# Altium PCB CFD_Chip_Test_noRouting.PcbDoc
Units mil, origin at the board's own origin, x right, y up, seen from the top; angles counter-clockwise.
Board outline 3165 x 2795 mil, 2 copper layers (Top Layer, Bottom Layer); 72 components, 49 nets, 279 pads, 30 vias.
Unrouted connection lines stored in the file: 183.
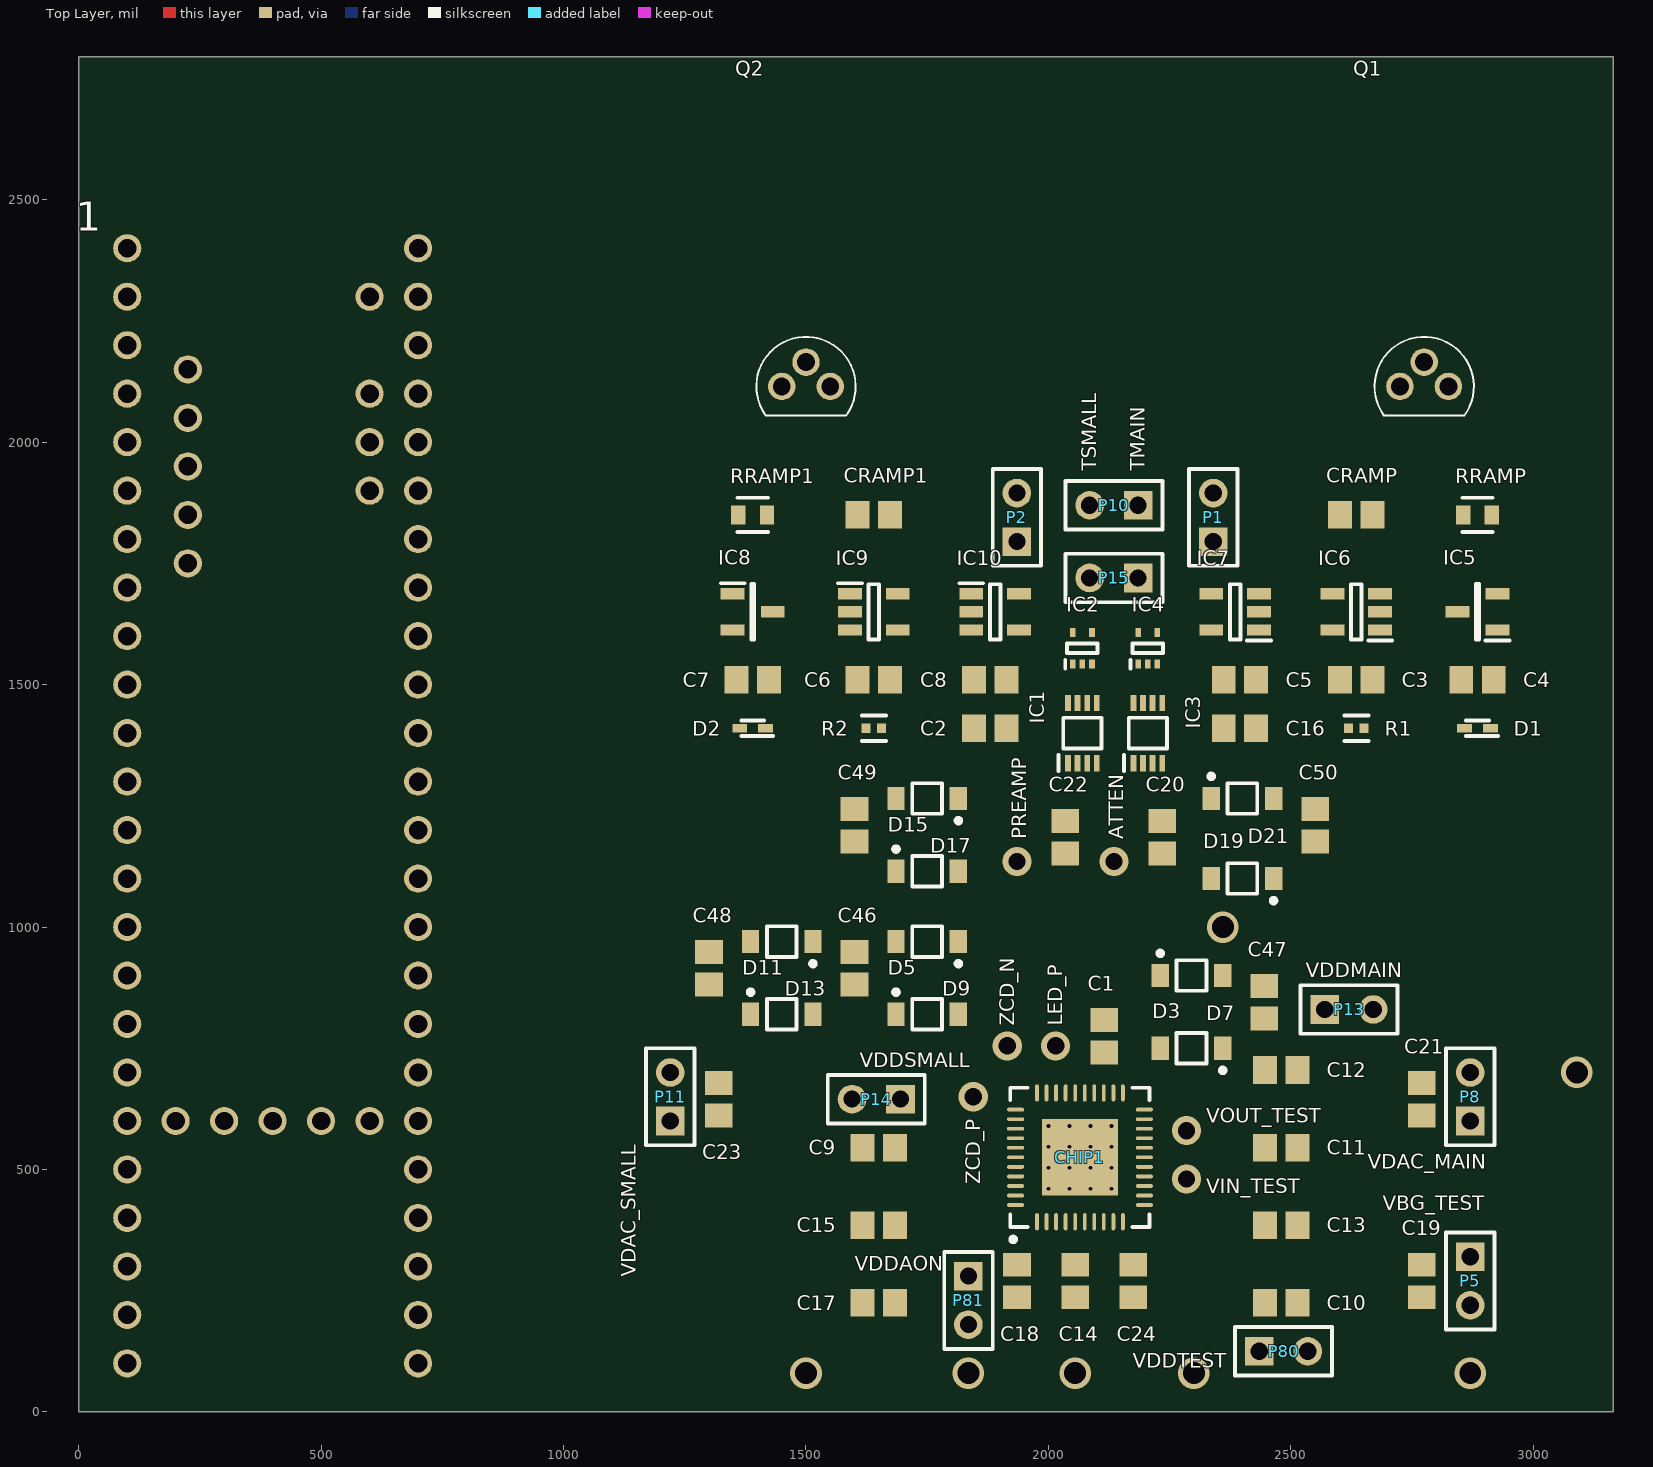
[diagram p0: Top Layer view]
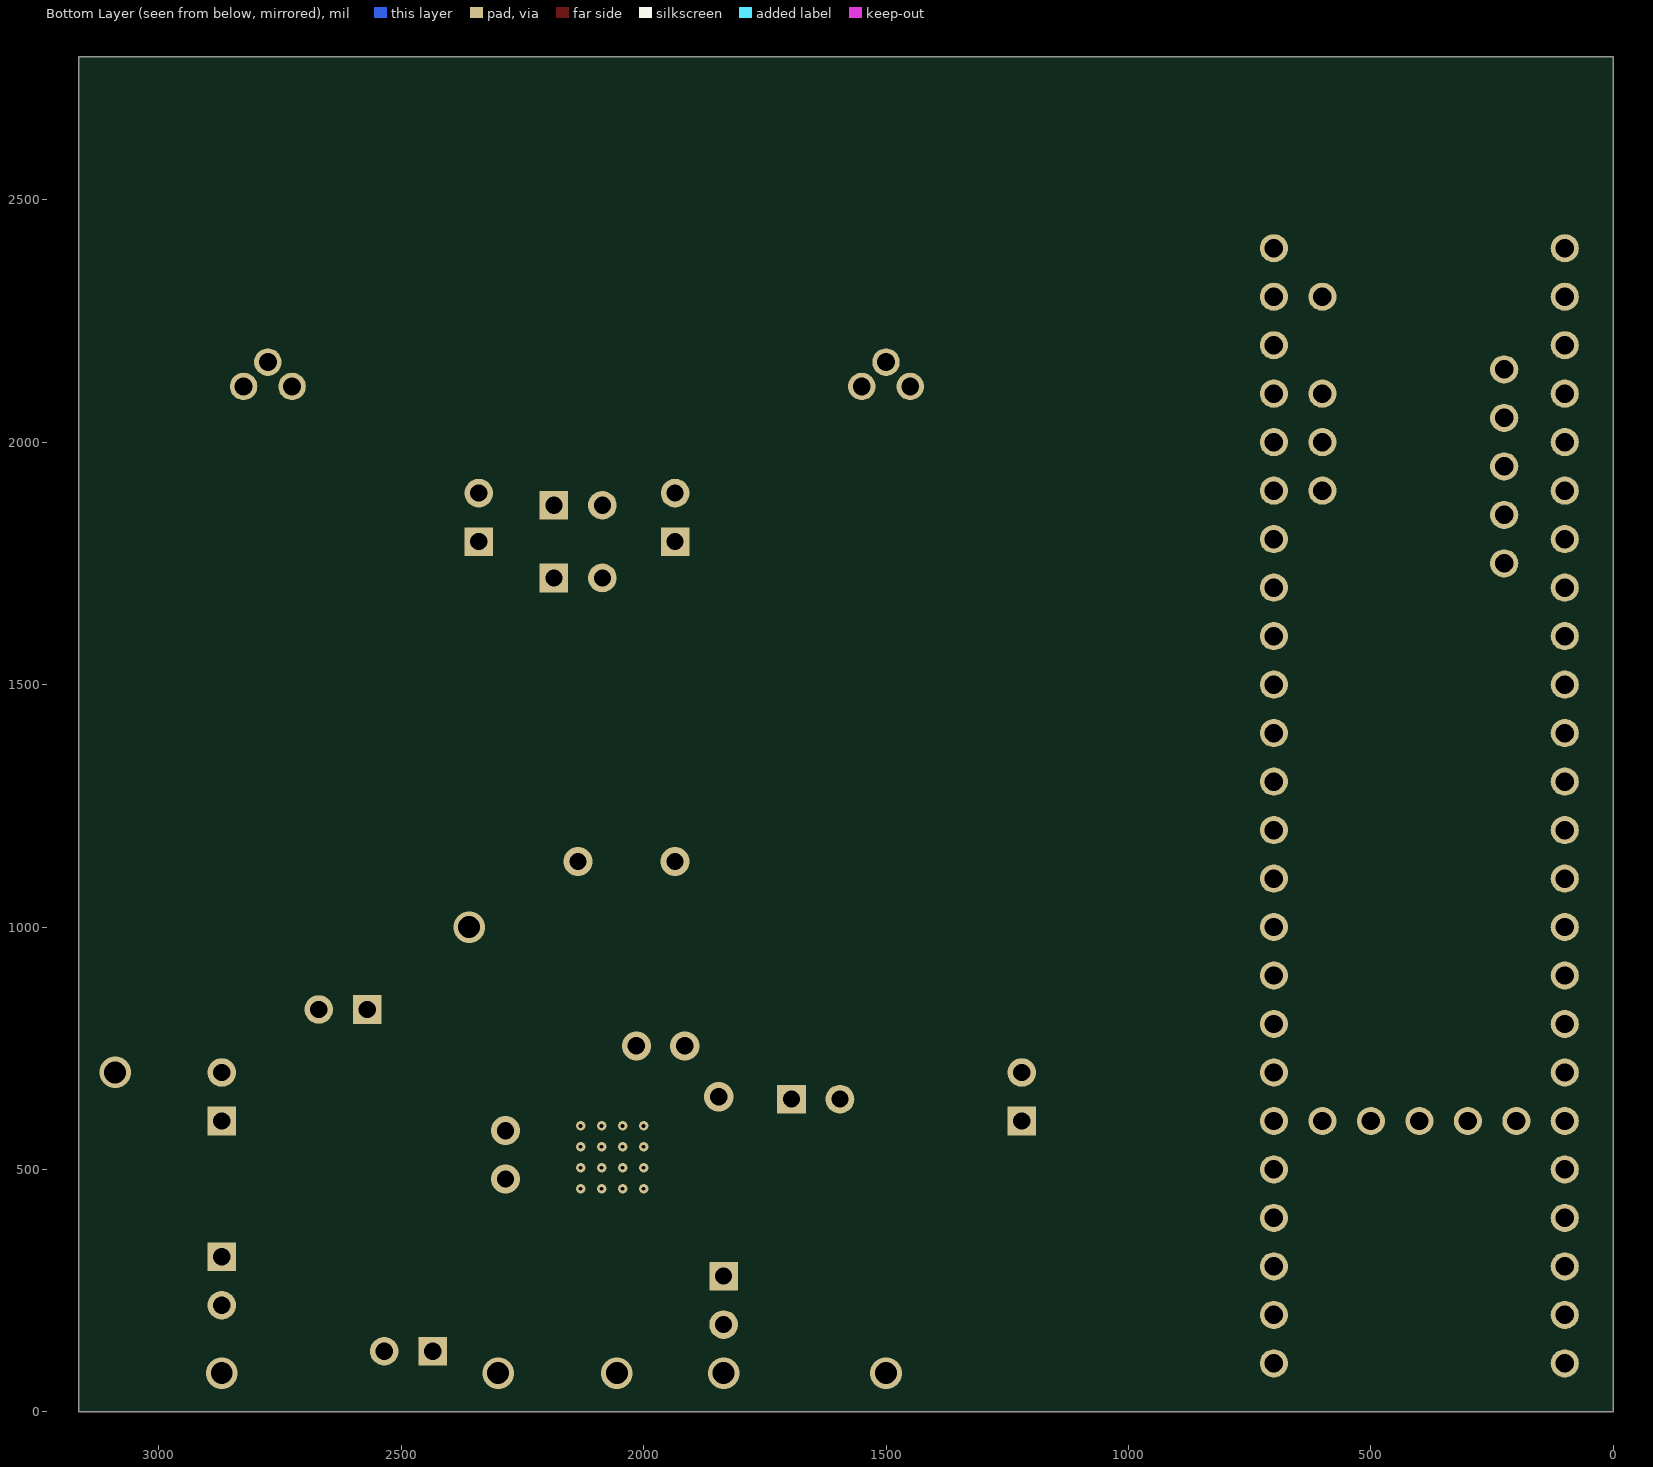
[diagram p1: Bottom Layer view, seen from below]

## Layer stack, top to bottom
Top Solder: solder mask 0.4, Solder Resist, Dk 3.5
Top Layer: signal copper 1.4
Dielectric 1: dielectric 12.6, FR-4, Dk 4.8
Bottom Layer: signal copper 1.4
Bottom Solder: solder mask 0.4, Solder Resist, Dk 3.5

## Board outline
0,0 3165,0 3165,2795 0,2795

## Design rules (kind name [scope] priority, off if disabled: settings)
AcuteAngle [All] p1: minimum=6.00000000000000E+0001 checktracksonly=FALSE
BoardOutlineClearance [All] p1: gap=15 ignorepadtopadclearanceinfootprint=FALSE
Clearance Clearance_outa_inner2 [InNamedPolygon('outa_inner2')] p1: gap=40 ignorepadtopadclearanceinfootprint=FALSE except(0: Arc-Hole Track-Hole SMDPad-Hole THPad-Hole Via-Hole Fill-Hole Poly-Hole Region-Hole Text-Hole)
Clearance Clearance_gnd_adc_vbus [InNamedPolygon('gnd_adc') vs InNet('VBUS')] p2: gap=60 ignorepadtopadclearanceinfootprint=FALSE except(0: Arc-Hole Track-Hole SMDPad-Hole THPad-Hole Via-Hole Fill-Hole Poly-Hole Region-Hole Text-Hole)
Clearance Clearance_gnd_adc [InNamedPolygon('gnd_adc')] p3: gap=20 ignorepadtopadclearanceinfootprint=FALSE except(0: Arc-Hole Track-Hole SMDPad-Hole THPad-Hole Via-Hole Fill-Hole Poly-Hole Region-Hole Text-Hole)
Clearance Clearance_dgnd [InNamedPolygon('dgnd')] p4: gap=15 ignorepadtopadclearanceinfootprint=FALSE except(0: Arc-Hole Track-Hole SMDPad-Hole THPad-Hole Via-Hole Fill-Hole Poly-Hole Region-Hole Text-Hole)
Clearance Clearance_vbus_keepout [InPolygon vs OnLayer('Keep-Out Layer')] p5: gap=20 ignorepadtopadclearanceinfootprint=FALSE except(0: Arc-Hole Track-Hole SMDPad-Hole THPad-Hole Via-Hole Fill-Hole Poly-Hole Region-Hole Text-Hole)
Clearance Clearance_vbus [InNamedPolygon('vbus')] p6: gap=60 ignorepadtopadclearanceinfootprint=FALSE except(0: Arc-Hole Track-Hole SMDPad-Hole THPad-Hole Via-Hole Fill-Hole Poly-Hole Region-Hole Text-Hole)
Clearance Clearance_gnd [InNamedPolygon('gnd')] p7: gap=10 ignorepadtopadclearanceinfootprint=FALSE except(0: Arc-Hole Track-Hole SMDPad-Hole THPad-Hole Via-Hole Fill-Hole Poly-Hole Region-Hole Text-Hole)
Clearance [All] p8: gap=5 ignorepadtopadclearanceinfootprint=FALSE except(0: Arc-Hole Track-Hole SMDPad-Hole THPad-Hole Via-Hole Fill-Hole Poly-Hole Region-Hole Text-Hole)
DiffPairsRouting [All] p1: maxlimit=25 minlimit=5 mostfreqgap=6 toplayer_minwidth=10 toplayer_maxwidth=15 toplayer_prefwidth=15 bottomlayer_minwidth=10 bottomlayer_maxwidth=15 bottomlayer_prefwidth=15 maxuncoupledlength=500
HoleSize [All] p1: absolutevalues=TRUE maxlimit=300 minlimit=10 maxpercent=80.000 minpercent=20.000
MinimumAnnularRing [All] p1: minimumring=5
MinimumSolderMaskSliver [All] p1: minsoldermaskwidth=4
PlaneConnect [All] p1: planeconnectstyle=Relief reliefexpansion=5 reliefentries=4 reliefconductorwidth=10 reliefairgap=10
PolygonConnect [All] p1: connectstyle=Relief reliefconductorwidth=6 reliefentries=4 polygonreliefangle="90 Angle" airgapwidth=6
RoutingVias [All] p1: holewidth=12 width=24 viastyle="Through Hole" minholewidth=10 minwidth=22 maxholewidth=200 maxwidth=200
SilkToSilkClearance [All] p1: silktosilkclearance=5
SilkToSolderMaskClearance [IsPad] p1: minsilkscreentomaskgap=3 clearancetoexposedcopper=FALSE
SolderMaskExpansion [All] p1: expansion=2.2 istentingtop=FALSE
Width [All] p1: maxlimit=1000 minlimit=5 preferedwidth=10 minimp=50.000000 maximp=50.000000 favimp=50.000000
24 further rules are at their usual default settings.

## Classes and differential pairs
component class TAC: C3 C4 C5 C6 C7 C8 CRAMP CRAMP1 D1 D2 IC5 IC6 IC7 IC8 IC9 IC10 P1 P2 Q1 Q2 R1 R2 RRAMP RRAMP1
component class Interface: 1 C1 C19 C20 C21 C22 C23 C46 C47 C48 C49 C50 D3 D5 D7 D9 D11 D13 D15 D17 D19 D21 P5 P8 P10 P11 P13 P14 P15 P80 P81
component class Chip: C2 C9 C10 C11 C12 C13 C14 C15 C16 C17 C18 C24 CHIP1 IC1 IC2 IC3 IC4

## Components (designator, comment, footprint, x,y, rotation, side; value= is the part's Value field where it differs from the comment)
1 "TEENSY_3.5/3.6" TEENSY_3.5/3.6 400,1300 r270 top
C1 "Value?" CAPC2013X140X45NL15T25 2115,775 r270 top
C2 ".01uF" CAPC2013X140X45NL15T25 1880,1410 r180 top
C3 ".1uF" CAPC2013X140X45NL15T25 2635,1510 r0 top
C4 "1uF" CAPC2013X140X45NL15T25 2885,1510 r0 top
C5 ".1uF" CAPC2013X140X45NL15T25 2395,1510 r0 top
C6 ".1uF" CAPC2013X140X45NL15T25 1640,1510 r180 top
C7 "1uF" CAPC2013X140X45NL15T25 1390,1510 r180 top
C8 ".1uF" CAPC2013X140X45NL15T25 1880,1510 r180 top
C9 ".01uF" CAPC2013X140X45NL15T25 1650,545 r0 top
C10 ".01uF" CAPC2013X140X45NL15T25 2480,225 r180 top
C11 ".01uF" CAPC2013X140X45NL15T25 2480,545 r180 top
C12 ".01uF" CAPC2013X140X45NL15T25 2480,705 r180 top
C13 ".01uF" CAPC2013X140X45NL15T25 2480,385 r180 top
C14 ".01uF" CAPC2013X140X45NL15T25 2055,270 r90 top
C15 ".01uF" CAPC2013X140X45NL15T25 1650,385 r0 top
C16 ".01uF" CAPC2013X140X45NL15T25 2395,1410 r180 top
C17 ".01uF" CAPC2013X140X45NL15T25 1650,225 r0 top
C18 ".01uF" CAPC2013X140X45NL15T25 1935,270 r90 top
C19 "Value?" CAPC2013X140X45NL15T25 2770,270 r90 top
C20 "Value?" CAPC2013X140X45NL15T25 2235,1185 r270 top
C21 "Value?" CAPC2013X140X45NL15T25 2770,645 r270 top
C22 "Value?" CAPC2013X140X45NL15T25 2035,1185 r270 top
C23 "Value?" CAPC2013X140X45NL15T25 1320,645 r270 top
C24 ".01uF" CAPC2013X140X45NL15T25 2175,270 r90 top
C46 ".01uF" CAPC2013X140X45NL15T25 1600,915 r270 top
C47 ".01uF" CAPC2013X140X45NL15T25 2445,845 r270 top
C48 ".01uF" CAPC2013X140X45NL15T25 1300,915 r270 top
C49 ".01uF" CAPC2013X140X45NL15T25 1600,1210 r270 top
C50 ".01uF" CAPC2013X140X45NL15T25 2550,1210 r270 top
CHIP1 "CFD" QFN50P700X700X80_HS-43N 2065,525 r90 top
CRAMP "" CAPC2013X140X45NL15T25 2635,1850 r0 top
CRAMP1 "" CAPC2013X140X45NL15T25 1640,1850 r180 top
D1 "1N4148WT" SODFL1608X70N 2885,1410 r180 top
D2 "1N4148WT" SODFL1608X70N 1390,1410 r180 top
D3 "" ONSC-SOD-123-2-425-04_V 2295,750 r180 top
D5 "" ONSC-SOD-123-2-425-04_V 1750,820 r0 top
D7 "" ONSC-SOD-123-2-425-04_V 2295,900 r0 top
D9 "" ONSC-SOD-123-2-425-04_V 1750,970 r180 top
D11 "" ONSC-SOD-123-2-425-04_V 1450,820 r0 top
D13 "" ONSC-SOD-123-2-425-04_V 1450,970 r180 top
D15 "" ONSC-SOD-123-2-425-04_V 1750,1115 r0 top
D17 "" ONSC-SOD-123-2-425-04_V 1750,1265 r180 top
D19 "" ONSC-SOD-123-2-425-04_V 2400,1100 r180 top
D21 "" ONSC-SOD-123-2-425-04_V 2400,1265 r0 top
IC1 "NL17SZ74USG" SOP50P310X90-8N 2070,1400 r90 top
IC2 "NL17SZ14XV5T2G" SOTFL50P160X60-5N 2070,1575 r90 top
IC3 "NL17SZ74USG" SOP50P310X90-8N 2205,1400 r90 top
IC4 "NL17SZ14XV5T2G" SOTFL50P160X60-5N 2205,1575 r90 top
IC5 "MAX6018BEUR18+T" SOT95P237X112-3N 2885,1650 r180 top
IC6 "MAX4490AUK+T" SOT95P280X145-5N 2635,1650 r180 top
IC7 "TMUX1101DBVR" SOT95P280X145-5N 2385,1650 r180 top
IC8 "MAX6018BEUR18+T" SOT95P237X112-3N 1390,1650 r0 top
IC9 "MAX4490AUK+T" SOT95P280X145-5N 1640,1650 r0 top
IC10 "TMUX1101DBVR" SOT95P280X145-5N 1890,1650 r0 top
P1 "Header 2" HDR1X2 2340,1795 r90 top
P2 "Header 2" HDR1X2 1935,1795 r90 top
P5 "Header 2" HDR1X2 2870,320 r270 top
P8 "Header 2" HDR1X2 2870,600 r90 top
P10 "Header 2" HDR1X2 2185,1870 r180 top
P11 "Header 2" HDR1X2 1220,600 r90 top
P13 "Header 2" HDR1X2 2570,830 r0 top
P14 "Header 2" HDR1X2 1695,645 r180 top
P15 "Header 2" HDR1X2 2185,1720 r180 top
P80 "Header 2" HDR1X2 2435,125 r0 top
P81 "Header 2" HDR1X2 1835,280 r270 top
Q1 "2N7000" TO-92_(TO-226) 2725,2115 r180 top
Q2 "2N7000" TO-92_(TO-226) 1450,2115 r180 top
R1 "470Ohm" FP-CRCW0402-e3-IPC_C 2635,1410 r180 top
R2 "470Ohm" FP-CRCW0402-e3-IPC_C 1640,1410 r0 top
RRAMP "" FP-CRCW0603-e3-MFG 2885,1850 r0 top
RRAMP1 "" FP-CRCW0603-e3-MFG 1390,1850 r180 top

## Footprints (in the part's own frame and the unit in brackets; to place one, negate y for a bottom-side part, rotate by r counter-clockwise, add the part's x,y. Pads: shape width x height; smd on the part's side, far side on the other; paste and mask are expansions set on the pad)
CAPC2013X140X45NL15T25 [mm] "Chip Capacitor, 2-Leads, Body 2.00x1.25mm, IPC Medium Density"
  rect 1.25x1.45 smd: 1(-0.85,0) 2(0.85,0)
  body extent -1.08,-0.7 1.07,0.7, height 1.4
FP-CRCW0402-e3-IPC_C [mil]
  rect 18.43x18.6 smd paste+0 mask+0: 1(-15.83,0) 2(15.83,0)
  silkscreen extent -25,-27 25,27, body extent -29,-15 29,15, height 10
FP-CRCW0603-e3-MFG [mm]
  rect 0.75x1 smd paste+0 mask+0: 1(-0.75,0) 2(0.75,0)
  silkscreen extent -0.8,-0.9 0.8,0.9, body extent -1.22,-0.6 1.22,0.6, height 0.25
HDR1X2 [mm] "Connector; Header; 2 Position"
  rect 1.5x1.5 hole 0.9: 1(0,0)
  round 1.5 hole 0.9: 2(2.54,0)
  silkscreen extent -1.27,-1.27 3.81,1.27
ONSC-SOD-123-2-425-04_V [mm] "SOD, 2-Leads, Body 2.69x1.6mm"
  rect 0.91x1.22 smd: 1(-1.635,0) 2(1.635,0)
  silkscreen extent -1.76,-0.8 0.78,1.28, body extent -1.35,-0.8 1.35,0.8, height 1.35
QFN50P700X700X80_HS-43N [mm] "QFN, 42-Leads, Body 7.00x7.00mm, Pitch 0.50mm, Thermal Pad 4.00x4.00mm, IPC Medium Density"
  oval 0.9x0.2 smd: 1(-3.375,2.25) 2(-3.375,1.75) 3(-3.375,1.25) 4(-3.375,0.75) 5(-3.375,0.25) 6(-3.375,-0.25) 7(-3.375,-0.75) 8(-3.375,-1.25) 9(-3.375,-1.75) 10(-3.375,-2.25) 22(3.375,-2.25) 23(3.375,-1.75) 24(3.375,-1.25) 25(3.375,-0.75) 26(3.375,-0.25) 27(3.375,0.25) 28(3.375,0.75) 29(3.375,1.25) 30(3.375,1.75) 31(3.375,2.25)
  oval 0.2x0.9 smd: 11(-2.5,-3.375) 12(-2,-3.375) 13(-1.5,-3.375) 14(-1,-3.375) 15(-0.5,-3.375) 16(0,-3.375) 17(0.5,-3.375) 18(1,-3.375) 19(1.5,-3.375) 20(2,-3.375) 21(2.5,-3.375) 32(2.5,3.375) 33(2,3.375) 34(1.5,3.375) 35(1,3.375) 36(0.5,3.375) 37(0,3.375) 38(-0.5,3.375) 39(-1,3.375) 40(-1.5,3.375) 41(-2,3.375) 42(-2.5,3.375)
  rect 4x4 smd: 43(0,0)
  silkscreen extent -4.42,-3.65 3.65,3.65, body extent -3.5,-3.5 3.5,3.5, height 0.8
SODFL1608X70N [mm]
  rect 0.78x0.47 smd: 1(-0.675,0) 2(0.675,0)
  silkscreen extent -1.06,-0.4 0.6,0.4, body extent -0.8,-0.4 0.8,0.4, height 0.7
SOP50P310X90-8N [mm]
  rect 0.85x0.3 smd: 1(-1.575,0.75) 2(-1.575,0.25) 3(-1.575,-0.25) 4(-1.575,-0.75) 5(1.575,-0.75) 6(1.575,-0.25) 7(1.575,0.25) 8(1.575,0.75)
  silkscreen extent -2,-1 0.8,1.25, body extent -1.55,-1 1.55,1, height 0.9
SOT95P237X112-3N [mm]
  rect 1.25x0.6 smd: 1(-1.05,0.95) 2(-1.05,-0.95) 3(1.05,0)
  silkscreen extent -1.68,-1.46 0.08,1.5, body extent -1.18,-1.46 1.18,1.46, height 1.12
SOT95P280X145-5N [mm]
  rect 1.25x0.6 smd: 1(-1.25,0.95) 2(-1.25,0) 3(-1.25,-0.95) 4(1.25,-0.95) 5(1.25,0.95)
  silkscreen extent -1.88,-1.45 0.28,1.5, body extent -1.4,-1.45 1.4,1.45, height 1.45
SOTFL50P160X60-5N [mm]
  rect 0.465x0.3 smd: 1(-0.832,0.5) 2(-0.832,0) 3(-0.832,-0.5) 4(0.832,-0.5) 5(0.832,0.5)
  silkscreen extent -1.06,-0.8 0.25,0.9, body extent -0.8,-0.8 0.8,0.8, height 0.6
TEENSY_3.5/3.6 [mil]
  round 58 / inner round 60 / far side round 58 hole 38: 0/RX(-1000,-300) 1/TX(-900,-300) 2(-800,-300) 3/CANTX(-700,-300) 3V3(300,-300) 3V3_2(700,-100) 3V3_LO(-900,300) 4/CANRX(-600,-300) 5(-500,-300) 6(-400,-300) 7(-300,-300) 8(-200,-300) 9/CS(-100,-300) 10/CS(0,-300) 11/MOSI(100,-300) 12/MISO(200,-300) 13/SCK(200,300) 14/A0(100,300) 15/A1(0,300) 16/A2(-100,300) 17/A3(-200,300) 18/A4/SDA(-300,300) 19/A5/SCL(-400,300) 20/A6(-500,300) 21/A7(-600,300) 21/DAC0(500,300) 22/A8(-700,300) 23/A9(-800,300) 24(400,-300) 25(500,-300) 26(600,-300) 27(700,-300) 28(800,-300) 29(900,-300) 30(1000,-300) 31/A12(1100,-300) 32/A13(1200,-300) 33/A14(1200,300) 34/A15(1100,300) 35/A16(1000,300) 36/A17(900,300) 37/A18(800,300) 38/A19(700,300) 39/A20(600,300) A10(-700,200) A11(-600,200) A22/DAC1(400,300) AGND(-1000,300) AREF(-800,200) GND(-1100,-300) GND2(300,300) GND3(700,0) PROG(700,100) RESET(700,200) U5V(-850,-175) UD+(-650,-175) UD-(-750,-175) UGND1(-550,-175) UGND2(-450,-175) VBAT(700,-200) VIN(-1100,300) VUSB(-1000,200)
TO-92_(TO-226) [mm]
  round 1.44 hole 0.94: 1(0,0) 2(-1.27,-1.27) 3(-2.54,0)
  silkscreen extent -3.87,-2.6 1.33,1.53, body extent -2.6,-15.62 2.6,5.33, height 1.59

## Part data
C1 C2 C3 C4 C5 C6 C7 C8 C9 C10 C11 C12 C13 C14 C15 C16 C17 C18 C19 C20 C21 C22 C23 C24 C46 C47 C48 C49 C50 CRAMP CRAMP1: library part CMP-2007-03395-1, "0402", Manufacturer=Murata, Part Number=GRM21BR71A106KE51L
D1 D2: "Diode", Manufacturer_Name=SEMTECH, Datasheet Link=https://datasheet.lcsc.com/szlcsc/Semtech-1N4148WT_C27748.pdf, Height=0.7mm, Manufacturer_Part_Number=1N4148WT
D3 D5 D7 D9 D11 D13 D15 D17 D19 D21: library part CMP-1060-00509-1, "Zener Voltage Regulator, 2-Pin SOD-123, Pb-Free, Tape and Reel", Manufacturer="On Semiconductor", PartNumber=MMSZ4679T1G, ComponentLink1Description="Manufacturer URL", ComponentLink1URL=http://www.onsemi.com/, ComponentLink2Description=Datasheet, ComponentLink2URL=http://www.onsemi.com/pub_link/Collateral/MMSZ4678T1-D.PDF, ComponentLink3Description="Package Specification", ComponentLink3URL=http://www.onsemi.com/pub_link/Collateral/425-04.PDF, DatasheetVersion="Rev. 9", Mounting Technology="Surface Mount", P Max (W)=0.5, PackageDescription="2-Pin SOD, Body 1.6 x 2.69 mm", PackageReference=SOD-123-2-425-04, PackageVersion="Rev. G, 10/2009", Packing="Tape and Reel", RoHS=Pb-Free, VZ Typ (V)=2
IC1 IC3: "Flip Flops 1.65-5.5V CMOS Single D-Type", Manufacturer_Name="ON Semiconductor", Datasheet Link=http://www.onsemi.com/pub/Collateral/NL17SZ74-D.PDF, Height=0.9mm, Manufacturer_Part_Number=NL17SZ74USG
IC2 IC4: "Integrated Circuit", Manufacturer_Name="ON Semiconductor", Mouser2 Part Number=863-NL17SZ14XV5T2G, Datasheet Link=https://componentsearchengine.com//NL17SZ14XV5T2G.pdf, Height=0.6mm, Manufacturer_Part_Number=NL17SZ14XV5T2G, Mouser2 Price/Stock=https://www.mouser.com/Search/Refine.aspx?Keyword=863-NL17SZ14XV5T2G
IC5 IC8: "Voltage References Precision, Micropower, 1.8V Supply, Low-Dropout, SOT23 Voltage Reference", Manufacturer_Name="Maxim Integrated", Datasheet Link=https://pdfserv.maximintegrated.com/en/ds/MAX6018-MAX6018B.pdf, Height=1.12mm, Manufacturer_Part_Number=MAX6018BEUR18+T
IC6 IC9: "Integrated Circuit", Manufacturer_Name="Maxim Integrated", Datasheet Link=https://pdfserv.maximintegrated.com/en/ds/MAX4490-MAX4492.pdf, Height=1.45mm, Manufacturer_Part_Number=MAX4490AUK+T
IC7 IC10: "Analog Switch ICs 3-pA on-state leakage current, 5-V, 1:1 (SPST), 1-channel precision switch (active low) 5-SOT-23 -40 to 125", Manufacturer_Name="Texas Instruments", Datasheet Link=https://www.ti.com/lit/ds/symlink/tmux1101.pdf?ts=1618527438207, Height=1.45mm, Manufacturer_Part_Number=TMUX1101DBVR
P1 P2 P5 P8 P10 P11 P13 P14 P15 P80 P81: "Header, 2-Pin", LatestRevisionDate=17-Jul-2002, LatestRevisionNote="Re-released for DXP Platform.", Publisher="Altium Limited"
Q1 Q2: "MOSFET (N-Channel)", Manufacturer_Name="ON Semiconductor", Mouser2 Part Number=512-2N7000, Datasheet Link=https://componentsearchengine.com//2N7000.pdf, Manufacturer_Part_Number=2N7000, Mouser2 Price/Stock=https://www.mouser.com/Search/Refine.aspx?Keyword=512-2N7000
R1 R2: library part CMP-2002-08122-2, "RES Thick Film, 0Ω, 0.063W, 0402", Case Code (Imperial)=0402, Case Code (Metric)=1005, Max Operating Temperature=155°C, Max Power Dissipation=63mW, Min Operating Temperature=-55°C, Package Quantity=1, Resistance=0mR, Temperature Coefficient=100ppm/°C, Tolerance=5%, Voltage Rating=50V, Case/Package=0402, Composition="Thick Film", Contact Plating=Tin, Depth=0.5mm, Features="Automotive AEC-Q200", Height=0.35mm, Lead Free="Lead Free", Length=1mm, Military Standard=Not, Mount="Surface Mount", Number of Terminations=2, Packaging="Tape and Reel", Power Rating=63mW, Radiation Hardening=No, Termination=SMD/SMT, Voltage Rating (DC)=50V, Weight=2.3E-05oz, Width=0.5mm
RRAMP RRAMP1: library part CMP-2000-03013-2, "RES Thick Film, 1MΩ, 1%, 0.1W, 100ppm/°C, 0603", Case Code (Imperial)=0603, Case Code (Metric)=1608, Max Operating Temperature=155°C, Max Power Dissipation=100mW, Min Operating Temperature=-55°C, Package Quantity=10, Resistance=1MR, Temperature Coefficient=100ppm/°C, Tolerance=1%, Voltage Rating=75V, Case/Package=0603, Composition="Thick Film", Contact Plating=Tin, Depth=0.85mm, Features="Automotive AEC-Q200", Height=0.45mm, Lead Free="Lead Free", Length=1.55mm, Military Standard=Not, Mount="Surface Mount", Number of Pins=2, Number of Terminations=2, Packaging="Tape and Reel", Power Rating=100mW, Radiation Hardening=No, Termination=SMD/SMT, Voltage Rating (DC)=75V, Weight=7.1E-05oz, Width=0.85mm
1: DeviceSetName=TEENSY_3.5/3.6, GateName_1=G$1, LibraryName=Teensy356, Package=TEENSY_3.5/3.6, SymbolName_1=TEENSY_3.5/3.6

## Via types
v1: diameter 19.68, hole 7.87, Top Layer to Bottom Layer, 16 vias
v2: diameter 65, hole 45, Top Layer to Bottom Layer, 7 vias
v3: diameter 60, hole 35.43, Top Layer to Bottom Layer, 7 vias

## Nets (pads, with @x,y where several pads share a name; then routed paths per layer and width w, separated by ;. In a path a pad name is that pad's centre, name@x,y a point inside that pad or via, vN(x,y) a via of type N, cw(c..) or ccw(c..) an arc to the next point about the centre after c; other vN are vias at no path point)
+1.8VA: C46.2 C47.2 C48.2 C49.2 C50.2 D3.1 D5.1 D11.1 D15.1 D19.1
+1.8VD: C2.2 C16.2 IC1.2 IC1.7 IC1.8 IC2.5 IC3.2 IC3.7 IC3.8 IC4.5
+5VD: C5.2 C8.2 IC6.5 IC7.5 IC9.5 IC10.5 R1.2 R2.2
/RST_TIME: IC1.6 IC3.6
/SCAN_IN: 1.34/A15 CHIP1.1
/SCAN_LOAD: 1.35/A16 CHIP1.42
/SCAN_OUT: 1.37/A18 CHIP1.39
/TIME_MAIN: IC3.3 IC4.2 IC7.4
/TIME_SMALL: IC1.3 IC2.2 IC10.4
GND: 1.AGND 1.GND 1.GND2 C2.1 C3.1 C5.1 C6.1 C8.1 C9.1 C10.1 C11.1 C12.1 C13.1 C14.1 C15.1 C16.1 C17.1 C18.1 C19.1 C20.1 C21.1 C22.1 C23.1 C24.1 C46.1 C47.1 C48.1 C49.1 C50.1 CHIP1.2 CHIP1.7 CHIP1.11 CHIP1.20 CHIP1.22 CHIP1.33 CHIP1.36 CHIP1.38 CRAMP1.1 CRAMP.1 D7.2 D9.2 D13.2 D17.2 D21.2 IC1.4 IC2.3 IC3.4 IC4.3 IC6.2 IC7.3 IC9.2 IC10.3 P5.2 P8.2 P11.2 P13.2 P14.2 P80.2 P81.2 Q1.1 Q2.1
  other v2: 1835,80 2870,80 3090,700 2360,1000
IIN: C1.1
IIN_COUPLE: C1.2 CHIP1.26 D3.2 D7.1
NetC3_2: C3.2 IC5.2 RRAMP.2
NetC4_1: C4.1 IC5.3 IC6.3 IC6.4 IC7.2
NetC4_2: C4.2 D1.1 IC5.1
NetC6_2: C6.2 IC8.2 RRAMP1.2
NetC7_1: C7.1 IC8.3 IC9.3 IC9.4 IC10.2
NetC7_2: C7.2 D2.1 IC8.1
NetCHIP1_24: CHIP1.24 IC3.1
NetCHIP1_28: CHIP1.28 IC1.1
NetCRAMP1_2: CRAMP1.2 IC9.1 Q2.3 RRAMP1.1
NetCRAMP_2: CRAMP.2 IC6.1 Q1.3 RRAMP.1
NetD1_2: D1.2 R1.1
NetD2_2: D2.2 R2.1
NetIC7_1: IC7.1 P1.1
NetIC10_1: IC10.1 P2.1
RST_TEST: 1.33/A14 CHIP1.15
RST_TIME: 1.14/A0 Q1.2 Q2.2
SCAN_CLK: 1.36/A17 CHIP1.41
TIME_MAIN: IC3.5 P15.1
TIME_MAIN_OUT: IC4.4 P10.1
TIME_SMALL: IC1.5 P15.2
TIME_SMALL_OUT: IC2.4 P10.2
VBG_TEST: C19.2 CHIP1.14 P5.1
VDAC_MAIN: C21.2 CHIP1.21 P8.1
VDAC_SMALL: C23.2 CHIP1.32 P11.1
VDDAON: C17.2 C18.2 C24.2 CHIP1.3 CHIP1.9 CHIP1.40 P81.1
VDDHV: C13.2 C14.2 C15.2 CHIP1.5 CHIP1.13 CHIP1.37
  other v2: 1500,80 2055,80 2300,80
VDDMAIN: C11.2 C12.2 CHIP1.19 CHIP1.23 P13.1
VDDSMALL: C9.2 CHIP1.34 P14.1
VDDTEST: C10.2 CHIP1.12 P80.1
VIN_TEST: CHIP1.16 D19.2 D21.1
  other v3: 2285,480
VINN_ZCD_SMALL: CHIP1.30 D15.2 D17.1
  other v3: 1915,755
VINP_LED_SMALL: CHIP1.29 D5.2 D9.1
  other v3: 2015,755
VINP_ZCD_SMALL: CHIP1.31 D11.2 D13.1
  other v3: 1845,650
VOUT_TEST: CHIP1.17
  other v3: 2285,580
VREF_ATTEN: C20.2 CHIP1.25
  other v3: 2135,1135
VREF_PREAMP: C22.2 CHIP1.27
  other v3: 1935,1135
VTAC: 1.23/A9 P1.2 P2.2
pads on no net: 1.0/RX 1.1/TX 1.2 1.3/CANTX 1.3V3 1.3V3_2 1.3V3_LO 1.4/CANRX 1.5 1.6 1.7 1.8 1.9/CS 1.10/CS 1.11/MOSI 1.12/MISO 1.13/SCK 1.15/A1 1.16/A2 1.17/A3 1.18/A4/SDA 1.19/A5/SCL 1.20/A6 1.21/A7 1.21/DAC0 1.22/A8 1.24 1.25 1.26 1.27 1.28 1.29 1.30 1.31/A12 1.32/A13 1.38/A19 1.39/A20 1.A10 1.A11 1.A22/DAC1 1.AREF 1.GND3 1.PROG 1.RESET 1.U5V 1.UD+ 1.UD- 1.UGND1 1.UGND2 1.VBAT 1.VIN 1.VUSB CHIP1.4 CHIP1.6 CHIP1.8 CHIP1.10 CHIP1.18 CHIP1.35 CHIP1.43 IC2.1 IC4.1
copper on no net:
  other v1: 2000.04,460.04 2043.35,460.04 2086.65,460.04 2129.96,460.04 2000.04,503.35 2043.35,503.35 2086.65,503.35 2129.96,503.35 2000.04,546.65 2043.35,546.65 2086.65,546.65 2129.96,546.65 2000.04,589.96 2043.35,589.96 2086.65,589.96 2129.96,589.96

## Silkscreen, mask and mechanical layers (free items; w line width, h text height)
Top Overlay:
  text "TSMALL" at 2099,1941 h30 r90
  text "TMAIN" at 2199,1941 h30 r90
  text "PREAMP" at 1954,1181 h30 r90
  text "ATTEN" at 2154,1181 h30 r90
  text "VDDMAIN" at 2531,896 h30
  text "ZCD_N" at 1929,796 h30 r90
  text "LED_P" at 2029,796 h30 r90
  text "VDDSMALL" at 1611,711 h30
  text "VOUT_TEST" at 2326,596 h30
  text "VDAC_MAIN" at 2659.08,501 h30
  text "ZCD_P" at 1859,469.05 h30 r90
  text "VIN_TEST" at 2326,451 h30
  text "VBG_TEST" at 2689.07,416 h30
  text "VDDAON" at 1600.98,291 h30
  text "VDAC_SMALL" at 1149,279.09 h30 r90
  text "VDDTEST" at 2174.06,91 h30